# Altium PCB lisa_mx_s.PcbDoc
Units mm, origin at the board's own origin, x right, y up, seen from the top; angles counter-clockwise.
Board outline 19.41 x 21.74 mm, 4 copper layers (Top Layer, Vcc, GND, Bottom Layer); 55 components, 66 nets, 234 pads, 51 vias.
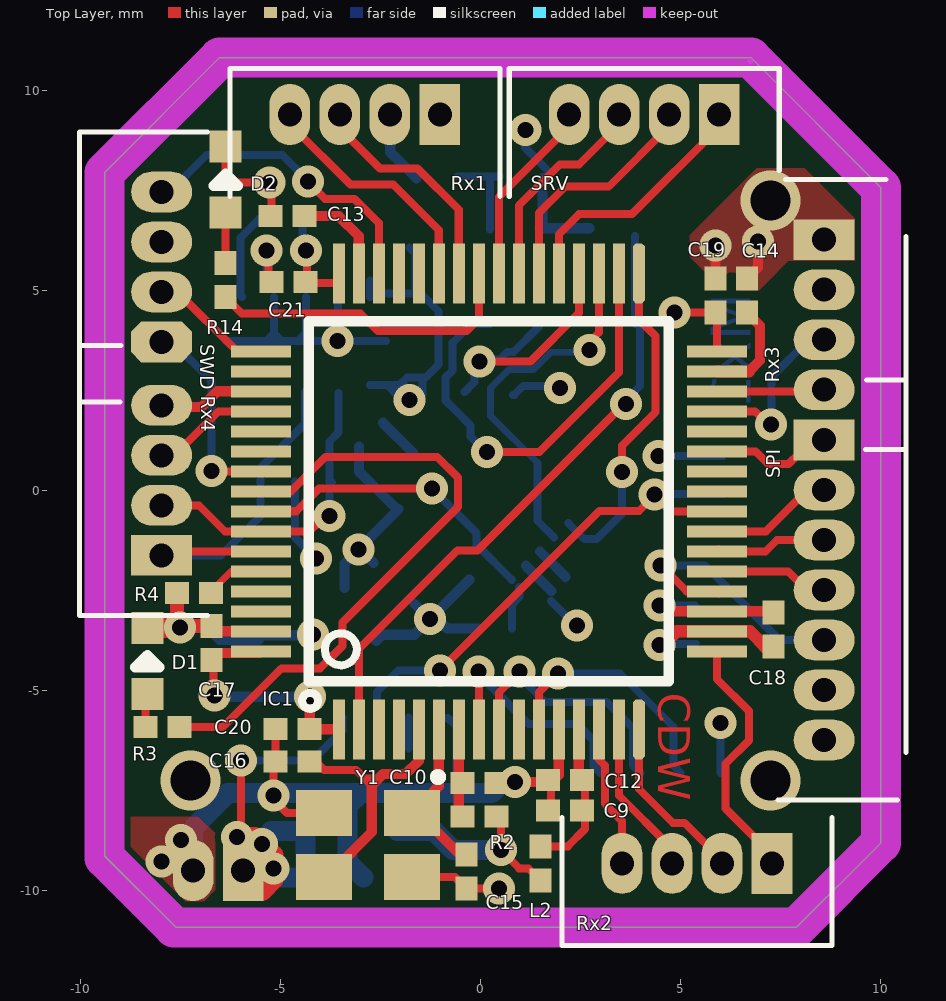
[diagram p0: Top Layer view]
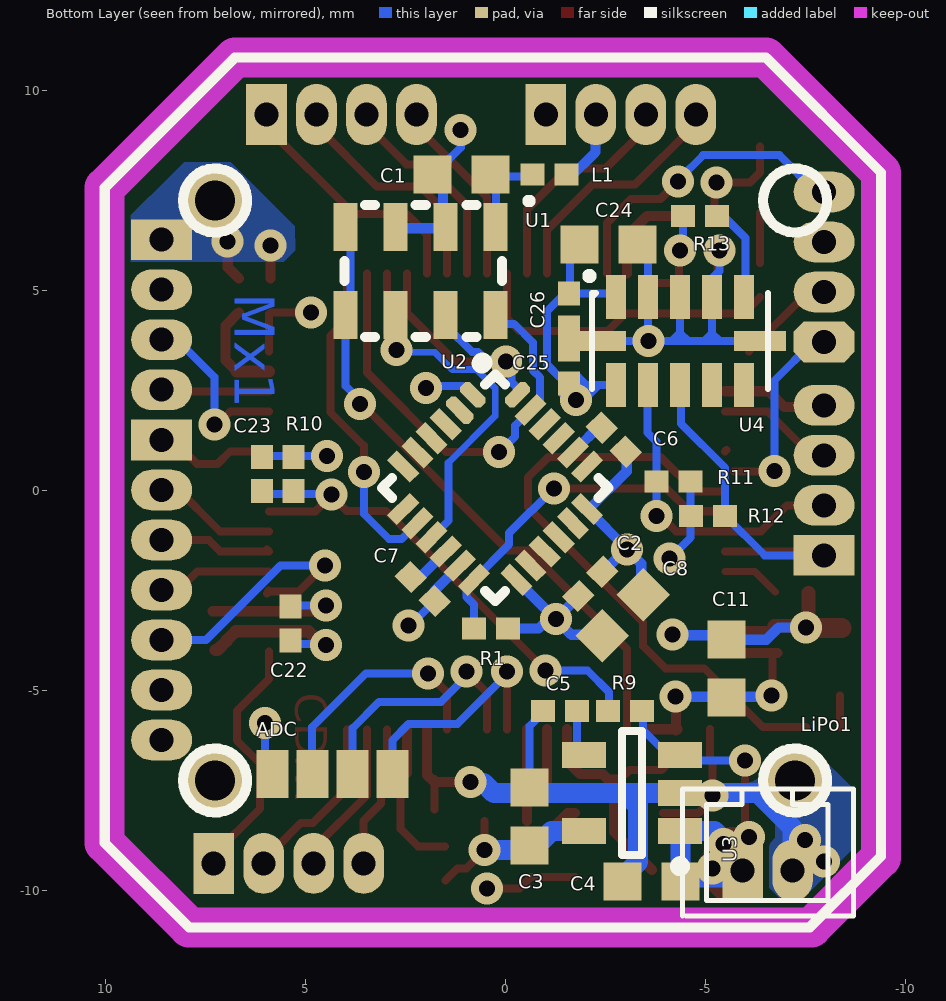
[diagram p1: Bottom Layer view, seen from below]
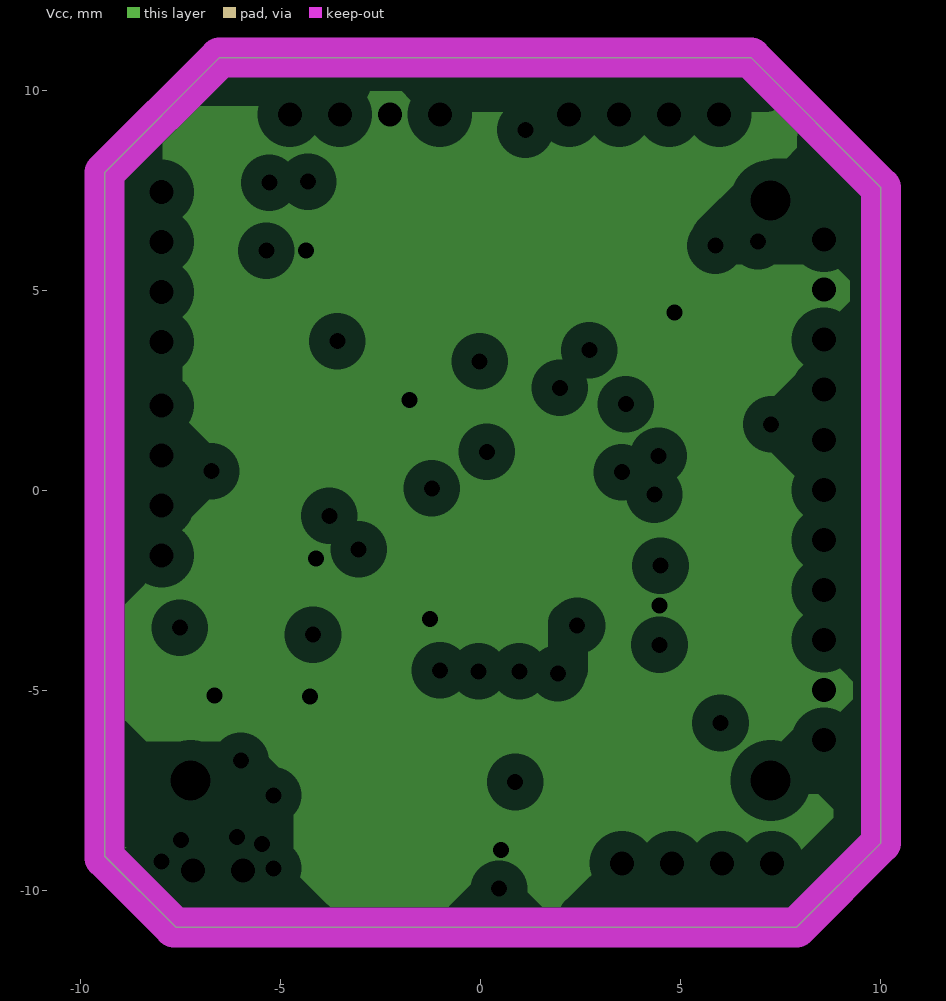
[diagram p2: Vcc, clearances drawn from the general rule]
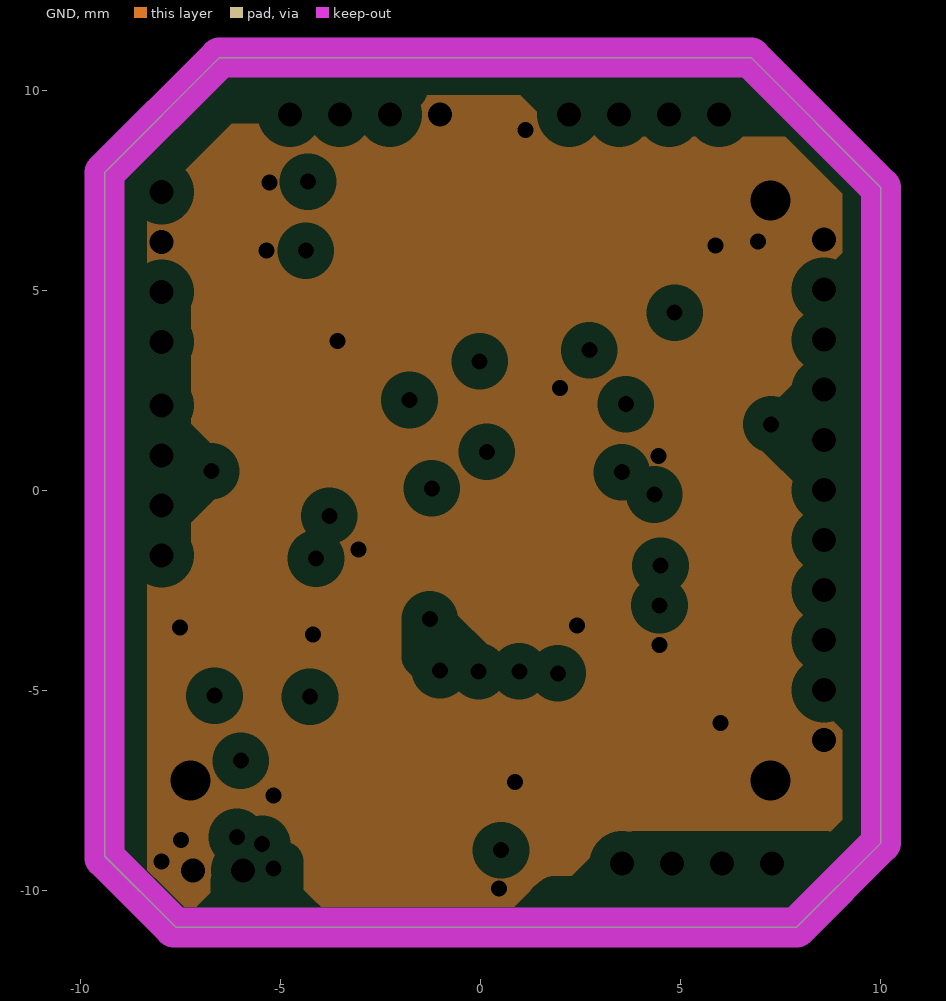
[diagram p3: GND, clearances drawn from the general rule]

## Layer stack, top to bottom
Top Layer: signal copper 0.0356
Dielectric: core 0.32, FR-4, Dk 4.8
Vcc: plane copper 0.0356, net (Multiple Nets)
Dielectric: prepreg 0.32, FR-4, Dk 4.8
GND: plane copper 0.0356, net GND
Dielectric: core 0.32, FR-4, Dk 4.8
Bottom Layer: signal copper 0.0356

## Board outline
-9.397,-9.143 -7.619,-10.921 7.9,-10.921 10.008,-8.813 10.008,7.57 6.757,10.821 -6.527,10.821 -9.397,7.951

## Design rules (kind name [scope] priority, off if disabled: settings)
Clearance [All] p1: gap=0.15
ComponentClearance [All] p1 off: gap=0.254 collisioncheckmode=3 verticalgap=0.254 showdistances=FALSE
MinimumSolderMaskSliver [All] p1 off: minsoldermaskwidth=0.254
NetAntennae [All] p1 off: netantennaetolerance=0
PlaneClearance [All] p1: clearance=0.508
PlaneConnect [All] p1: planeconnectstyle=Direct reliefexpansion=0.508 reliefentries=4 reliefconductorwidth=0.254 reliefairgap=0.254
PolygonConnect [All] p1: connectstyle=Direct reliefconductorwidth=0.254 reliefentries=4 polygonreliefangle="90 Angle"
RoutingVias [All] p1: holewidth=0.711 width=1.27 viastyle="Through Hole" minholewidth=0.4 minwidth=0.8 maxholewidth=2 maxwidth=3
SilkToSilkClearance [All] p1 off: silktosilkclearance=0.254
SilkscreenOverComponentPads [All] p1 off: minsilkscreentomaskgap=0.254
SolderMaskExpansion SolderMaskExpansion_1 [IsVia] p1: expansion=-1
SolderMaskExpansion [All] p2: expansion=0.102
TestPointUsage [All] p1: valid=0 allowmultiple=FALSE
Testpoint [All] p1: side=15 testpointundercomponent=TRUE minsize=1.016 maxsize=2.54 preferedsize=1.524 minholesize=0 maxholesize=1.016 preferedholesize=0.813 testpointgrid=0.025 style=1023 order=0-112345678
Width [All] p1: maxlimit=0.5 minlimit=0.15 preferedwidth=0.254 toplayer_prefwidth=0.2 bottomlayer_prefwidth=0.2 minimp=50.000000 maximp=50.000000 favimp=50.000000
17 further rules are at their usual default settings.

## Classes and differential pairs
component class whoop: LiPo1 P1 P2 P5 P6 Q1 Q2 Q3 Q4 R5 R6 R7 R8

## Components (designator, comment, footprint, x,y, rotation, side; value= is the part's Value field where it differs from the comment)
ADC "Header 4" 4pin1mmpitch 2.819,-7.087 r0 bottom
C1 "0603" V0603 1.093,7.9 r180 bottom
C2 "0402" V0402 -2.133,-2.336 r135 bottom
C3 "0603" V0603 -0.609,-8.153 r270 bottom
C4 "0603" V0603 -3.657,-9.778 r180 bottom
C5 "0402" V0402 -1.371,-5.511 r180 bottom
C6 "0402" V0402 -2.717,1.271 r225 bottom
C7 "0402" V0402 2.058,-2.463 r225 bottom
C8 "0603" V0603 -2.946,-3.124 r315 bottom
C9 "0402" V0402 2.109,-8 r0 top
C10 "0402" V0402 -0.025,-7.315 r180 top
C11 "0603" V0603 -5.537,-4.444 r90 bottom
C12 "0402" V0402 2.109,-7.238 r0 top
C13 "0402" V0402 -4.825,6.859 r0 top
C14 "0402" V0402 6.655,4.877 r270 top
C15 "0402" V0402 -0.355,-9.524 r90 top
C16 "0402" V0402 -4.698,-6.781 r180 top
C17 "0402" V0402 -6.73,-3.809 r270 top
C18 "0402" V0402 7.316,-3.479 r90 top
C19 "0402" V0402 5.868,4.877 r270 top
C20 "0402" V0402 -4.698,-5.968 r0 top
C21 "0402" V0402 -4.8,5.208 r0 top
C22 "0402" V0402 5.36,-3.327 r90 bottom
C23 "0402" V0402 6.071,0.407 r270 bottom
C24 "0603" V0603 -2.59,6.147 r0 bottom
C25 "0402" V0402 -1.6,3.099 r90 bottom
C26 "0402" V0402 -1.6,4.496 r270 bottom
D1 "RED" KP-1608SURC_R -8.331,-4.267 r90 top
D2 "RED" KP-1608SURC_R -6.375,7.772 r90 top
IC1 "STM32F40x-RG_Dirk" LQFP64 0.204,-0.271 r90 top
L1 "0402" V0402RES -1.117,7.9 r0 bottom
L2 "0402" V0402RES 1.499,-9.321 r90 top
LiPo1 "Header 2" PICOBLADE_53047-0210 -5.918,-9.5 r270 bottom
R1 "0402" V0402RES 0.356,-3.454 r180 bottom
R2 "0402" V0402RES -0.025,-8.153 r0 top
R3 "0402" V0402RES -7.95,-5.918 r180 top
R4 "0402" V0402RES -7.162,-2.565 r0 top
R9 "0402" V0402RES -2.997,-5.511 r180 bottom
R10 "0402" V0402RES 5.284,0.407 r270 bottom
R11 "0402" V0402RES -4.216,0.229 r180 bottom
R12 "0402" V0402RES -5.079,-0.634 r0 bottom
R13 "0402" V0402RES -4.877,6.858 r0 bottom
R14 "0402" V0402RES -6.375,5.258 r90 top
Rx1 "Header 4" PICOBLADE_53047-0410#1 -1.117,9.424 r90 top
Rx2 "Header 4" PICOBLADE_53047-0410#1 7.189,-9.296 r90 top
Rx3 "Header 4" PICOBLADE_53047-0410#1 8.56,6.173 r180 top
Rx4 "Header 4" PICOBLADE_53047-0410#1 -7.95,-1.523 r0 top
SPI "Header 7" PICOBLADE_53047-0710 8.586,1.194 r180 top
SRV "Header 4" PICOBLADE_53047-0410#1 5.868,9.424 r90 top
SWD "Header 4" PICOBLADE_53047-0410#2 -7.95,3.811 r0 top
U1 "MS5611-01BA01 or 03" MS5611-01BA 2.109,5.487 r270 bottom
U2 "MPU6000, MPU6050 or MPU9150" MPU60X0 0.247,0.066 r225 bottom
U3 "3.3V LDO" SOT-23-OT5_N -3.174,-7.569 r0 bottom
U4 "VL53L0X" VL53L0XTRA -4.368,3.734 r0 bottom
Y1 "3SMXB" CFPX-5 -2.819,-8.864 r180 top

## Footprints (in the part's own frame and the unit in brackets; to place one, negate y for a bottom-side part, rotate by r counter-clockwise, add the part's x,y. Pads: shape width x height; smd on the part's side, far side on the other; paste and mask are expansions set on the pad)
4pin1mmpitch [mm]
  rect 0.8x1.2 smd: 1(0,0) 2(1,0) 3(2,0) 4(3,0)
CFPX-5 [mm] "Quartz Crystal, SM; Body 3.4 x 2.7 mm (LxW max)"
  rect 1.4x1.15 smd: 1(-1.1,-0.8) 2(1.1,-0.8) 3(1.1,0.8) 4(-1.1,0.8)
  silkscreen extent -1.85,-1.8 -1.65,-1.6, body extent -1.9,-1.48 1.9,1.48, height 1
KP-1608SURC_R [mm]
  rect 0.8x0.8 smd: 1(-0.825,0) 2(0.825,0)
  silkscreen extent -0.15,-0.3 0.15,0.3, body extent -0.81,-0.41 0.79,0.38, height 1
LQFP64 [mm]
  rect 1.5x0.3 smd: 1(-5.7,3.75) 2(-5.7,3.25) 3(-5.7,2.75) 4(-5.7,2.25) 5(-5.7,1.75) 6(-5.7,1.25) 7(-5.7,0.75) 8(-5.7,0.25) 9(-5.7,-0.25) 10(-5.7,-0.75) 11(-5.7,-1.25) 12(-5.7,-1.75) 13(-5.7,-2.25) 14(-5.7,-2.75) 15(-5.7,-3.25) 34(5.7,-3.25) 35(5.7,-2.75) 36(5.7,-2.25) 37(5.7,-1.75) 38(5.7,-1.25) 39(5.7,-0.75) 40(5.7,-0.25) 41(5.7,0.25) 42(5.7,0.75) 43(5.7,1.25) 44(5.7,1.75) 45(5.7,2.25) 46(5.7,2.75) 47(5.7,3.25) 48(5.7,3.75)
  oct 1.5x0.3 smd: 16(-5.7,-3.75) 33(5.7,-3.75)
  rect 0.3x1.5 smd: 17(-3.75,-5.7) 18(-3.25,-5.7) 19(-2.75,-5.7) 20(-2.25,-5.7) 21(-1.75,-5.7) 22(-1.25,-5.7) 23(-0.75,-5.7) 24(-0.25,-5.7) 25(0.25,-5.7) 26(0.75,-5.7) 27(1.25,-5.7) 28(1.75,-5.7) 29(2.25,-5.7) 30(2.75,-5.7) 31(3.25,-5.7) 32(3.75,-5.7) 49(3.75,5.7) 50(3.25,5.7) 51(2.75,5.7) 52(2.25,5.7) 53(1.75,5.7) 54(1.25,5.7) 55(0.75,5.7) 56(0.25,5.7) 57(-0.25,5.7) 58(-0.75,5.7) 59(-1.25,5.7) 60(-1.75,5.7) 61(-2.25,5.7) 62(-2.75,5.7) 63(-3.25,5.7) 64(-3.75,5.7)
  silkscreen extent -5.19,-4.5 4.5,4.67, body extent -4.5,-4.5 4.5,4.5, height 2.54
MPU60X0 [mm] "4X4MM"
  oct 0.724x0.345 smd: 1(-2.038,1.25)
  oct 0.8x0.345 smd: 2(-2,0.75)
  rect 0.8x0.345 smd: 3(-2,0.25) 4(-2,-0.25) 5(-2,-0.75) 6(-2,-1.25) 13(2,-1.25) 14(2,-0.75) 15(2,-0.25) 16(2,0.25) 17(2,0.75) 18(2,1.25)
  rect 0.345x0.8 smd: 7(-1.25,-2) 8(-0.75,-2) 9(-0.25,-2) 10(0.25,-2) 11(0.75,-2) 12(1.25,-2) 19(1.25,2) 20(0.75,2) 21(0.25,2) 22(-0.25,2) 23(-0.75,2)
  oct 0.345x0.724 smd: 24(-1.25,2.038)
  silkscreen extent -2.44,-2 2,2, body extent -2,-2 2,2, height 0.9
MS5611-01BA [mm] "Precision Barometer"
  rect 1.2x0.6 smd: 1(-1.1,1.875) 2(-1.1,0.625) 3(-1.1,-0.625) 4(-1.1,-1.875) 5(1.1,-1.875) 6(1.1,-0.625) 7(1.1,0.625) 8(1.1,1.875)
  silkscreen extent -1.78,-1.91 1.65,2.74, body extent -1.5,-2.5 1.5,2.5, height 1.7
PICOBLADE_53047-0210 [mil]
  rect 60x40 hole 23.62: 1(0,0.79)
  oval 60x40 hole 23.62: 2(0,50)
  silkscreen extent -80,-58 45,110, body extent -80,-60 45,110, height 118
PICOBLADE_53047-0410#1 [mil]
  rect 60x40 hole 23.62: 1(-1,-3.82)
  oval 60x40 hole 23.62: 2(-1,45.39) 3(-1,94.61) 4(-1,143.82)
  silkscreen extent -82,-63 44,203
PICOBLADE_53047-0410#2 [mil]
  oct 60x40 hole 23.62: 1(-1,-3.82)
  oval 60x40 hole 23.62: 2(-1,45.39) 3(-1,94.61) 4(-1,143.82)
  silkscreen extent -82,-63 44,203
PICOBLADE_53047-0710 [mil]
  rect 60x40 hole 23.62: 1(0,-2.64)
  oval 60x40 hole 23.62: 2(0,46.57) 3(0,95.79) 4(0,145) 5(0,194.21) 6(0,243.43) 7(0,292.64)
  silkscreen extent -81,-62 45,352
SOT-23-OT5_N [mm] "SOT23, 5-Leads, Body 2.9x1.6mm, Pitch 0.95mm, Lead Span 2.7mm, IPC Medium Density"
  rect 1.1x0.65 smd: 1(-1.2,0.95) 2(-1.2,0) 3(-1.2,-0.95) 4(1.2,-0.95) 5(1.2,0.95)
  silkscreen extent -1.32,-1.55 0.25,1.95, body extent -0.9,-1.55 0.9,1.55, height 1.45
V0402 [mm] "Chip Capacitor; Body 1.0 x 0.5 mm (LxW typ)"
  rect 0.6x0.55 smd: 1(-0.425,0) 2(0.425,0)
  body extent -0.5,-0.25 0.5,0.25, height 0.5
V0402RES [mm] "Chip Capacitor; Body 1.0 x 0.5 mm (LxW typ)"
  rect 0.6x0.55 smd: 1(-0.425,0) 2(0.425,0)
  body extent -0.5,-0.25 0.5,0.25, height 0.25
V0603 [mm] "Chip Capacitor; Body 1.6 x 0.8 mm (LxW typ)"
  rect 0.95x0.95 smd: 1(-0.725,0) 2(0.725,0)
  body extent -0.8,-0.4 0.8,0.4, height 0.7
VL53L0XTRA [mm]
  rect 0.5x1.1 smd: 1(1.6,-1.1) 2(0.8,-1.1) 3(0,-1.1) 4(-0.8,-1.1) 5(-1.6,-1.1) 7(-1.6,1.1) 8(-0.8,1.1) 9(0,1.1) 10(0.8,1.1) 11(1.6,1.1)
  rect 1.3x0.5 smd: 6(-2,0) 12(2,0)
  silkscreen extent -2.2,-1.68 2.31,1.2, body extent -2.2,-1.2 2.2,1.2, height 1.05

## Part data
ADC Rx1 Rx2 Rx3 Rx4 SRV SWD: "Header, 4-Pin"
C1 C5 C8 C9 C10 C11 C12 C13 C14 C15 C16 C17 C18 C19 C20 C21 C22 C23: library part Cap, "Capacitor"
C2 C6 C7 C25 C26: library part CAP, "Capacitor"
C3 C4 C24: library part K0603_100nF_50V_X7R, "Capacitor"
D1 D2: library part LED2, "Typical RED, GREEN, YELLOW, AMBER GaAs LED"
L1 L2 R1 R2 R3 R4 R9 R10 R11 R12 R13 R14: library part Res3, "Resistor"
LiPo1: "Header, 2-Pin"
SPI: "Header, 7-Pin"
U1: library part MS5611-01BA01, "MS5611-01BA01 High Resolution Barometer Module"
U2: library part MPU6000, "INVENSENSE Integrated Dual Axis Gyroscope"
U3: library part LP2992AIM5-5.0, "Micropower 250 mA Low-Noise Ultra Low-Dropout Regulator in SOT-23 and LLP Packages"
Y1: "Surface Mount Quartz Crystal"

## Via types
v1: diameter 0.8, hole 0.4, Top Layer to Bottom Layer, 48 vias
v2: diameter 1.5, hole 1, Top Layer to Bottom Layer, 3 vias

## Nets (pads, with @x,y where several pads share a name; then routed paths per layer and width w, separated by ;. In a path a pad name is that pad's centre, name@x,y a point inside that pad or via, vN(x,y) a via of type N, cw(c..) or ccw(c..) an arc to the next point about the centre after c; other vN are vias at no path point)
+3.3V: C2.1 C3.2 C8.2 C11.1 C17.2 C18.2 C19.2 C20.2 C21.2 C22.2 C24.2 C25.1 C26.1 IC1.1 IC1.19 IC1.32 IC1.48 IC1.64 L1.1 L2.1 R1.2 R2.2 R11.2 R12.2 R13.2 Rx1.2 Rx3.2 SPI.6 U2.13 U3.5 U4.1 U4.11 | length 36
  Top Layer w0.2: v1@-6.68,-5.105 C17.2@-6.68,-4.235 ; C21.2@-4.417,5.182 IC1.48@-3.606,5.182 ; C21.2@-4.343,5.208 v1@-4.343,6.039 ; v1@-4.273,-5.162 v1(-4.267,-5.156) ; R2.2@0.509,-8.261 v1(0.509,-8.991) 0.964,-9.446 1.192,-9.446 L2.1@1.492,-9.746 ; v1(4.852,4.446) C19.2@5.861,4.446 ; IC1.32 C19.2@5.904,4.416
  Top Layer w0.254: C17.2@-6.811,-4.06 IC1.64@-5.536,-4.06 ; C20.2@-4.305,-5.971 IC1.1 ; C20.2@-4.273,-5.994 v1@-4.273,-5.162 ; v1@4.42,-2.641 4.8,-3.021 IC1.19 C18.2@7.316,-3.021
  Bottom Layer w0.2: R11.2 -4.641,-1.175 v1(-4.114,-1.701) ; v1@-4.452,6.007 R13.2 ; v1@-4.44,5.995 v1(-4.368,5.995) ; U4.11 v1@-1.912,2.634 ; U4.1 U4.1@-2.768,5.244 ; U4.1@-2.681,4.921 C26.1 ; -2.336,2.634 -2.065,2.363 -1.879,2.363 v1(-1.777,2.261) -1.676,2.363 -1.473,2.363 -1.447,2.388 C25.1@-1.447,2.751 ; -2.031,2.634 -1.846,2.82 -1.375,2.82 -1.049,3.146 -1.049,4.479 -1.625,5.055 -1.625,5.919 C24.2@-1.777,6.071 ; v1@4.496,-2.87 C22.2@5.353,-2.87
  Bottom Layer w0.254: v1@-6.73,-5.156 v1(-4.267,-5.156) ; C8.2@-2.611,-3.763 -2.454,-3.606 -1.657,-3.606 v1(-1.269,-3.218) ; Rx1.2@-2.27,8.982 -2.26,8.972 -2.26,8.459 L1.1@-1.6,7.798 ; C2.1@-1.653,-2.834 v1(-1.269,-3.218) ; v1@-1.177,-3.126 -1.165,-3.126 -0.838,-3.454 R1.2 ; U2.13 v1(-1.269,-3.218)
  Bottom Layer w0.5: U3.5@-2.076,-8.519 -1.158,-8.519 -0.685,-8.991 v1(0.509,-8.991)
  other v1: -6.655,-5.131 4.471,-2.87
+3.3V_AP_ANALOG: C9.2 C12.2 IC1.13 L2.2 | length 3.6
  Top Layer w0.2: L2.2 2.178,-8.896 2.61,-8.464 C12.2@2.61,-7.213
  Top Layer w0.254: C12.2@2.454,-7.058 IC1.13
ADC1A: ADC.3 IC1.11 | length 6.3
  Top Layer w0.2: IC1.11 1.454,-5.048 v1(1.931,-4.571)
  Bottom Layer w0.2: v1(1.931,-4.571) 3.479,-4.571 4.826,-5.918 4.826,-6.889 ADC.3@4.998,-7.061
ADC2A: ADC.1 IC1.8 | length 6
  Top Layer w0.2: v1@-0.304,-4.622 -0.046,-4.88 IC1.8
  Bottom Layer w0.2: v1@-0.126,-4.521 1.194,-5.841 2.412,-5.841 2.819,-6.248 2.819,-6.882 ADC.1@2.998,-7.061
  other v1: -0.05,-4.521
ADC3A: ADC.2 IC1.9 | length 6.4
  Top Layer w0.2: IC1.9 0.454,-5.058 0.813,-4.698 v1@0.813,-4.495
  Bottom Layer w0.2: v1@0.813,-4.495 1.601,-5.283 3.149,-5.283 3.81,-5.944 3.81,-6.873 ADC.2@3.998,-7.061
  other v1: 0.966,-4.521
BARO_CS: IC1.2 U1.4 U1.5 | length 15.6
  Top Layer w0.2: IC1.2 -3.046,-3.96 -0.584,-1.498 -0.076,-1.498 v1@3.581,2.159
  Bottom Layer w0.2: v1@3.581,2.21 3.988,2.617 U1.5@3.988,4.293 ; U1.5@3.861,4.166 U1.4@3.861,6.366
  other v1: 3.632,2.159
BOOTA: IC1.60 R4.2 | length 1.5
  Top Layer w0.178: R4.2@-6.756,-2.539 -6.241,-2.025 IC1.60@-5.504,-2.025
BYPCA: C5.2 U3.4 | length 0.8
  Bottom Layer w0.2: U3.4@-1.803,-6.452 C5.2@-1.803,-5.675
CPOUT_A: C6.1 U2.20 | length 1.1
  Bottom Layer w0.254: C6.1@-2.444,1.696 U2.20
DRDY: IC1.27 SPI.1 | length 2.3
  Top Layer w0.2: IC1.27 6.87,0.979 7.189,0.661 7.697,0.661 SPI.1@7.976,0.94
GND: ADC.4 C1.1 C2.2 C3.1 C4.1 C5.1 C6.2 C7.2 C8.1 C9.1 C10.1 C11.2 C12.1 C13.1 C14.1 C15.1 C16.2 C17.1 C18.1 C19.1 C20.1 C21.1 C22.1 C23.1 C24.1 C25.2 C26.2 D1.2 D2.2 IC1.12 IC1.18 IC1.63 LiPo1.2 R4.1 R10.1 Rx1.1 Rx3.1 SPI.7 SWD.3 U1.2 U1.3 U2.1 U2.11 U2.18 U3.2 U4.2 U4.3 U4.4 U4.6 U4.12 Y1.2 Y1.4 | length 63.6
  Top Layer w0.2: D2.2 -6.375,7.95 -6.122,7.697 v1(-5.283,7.697) ; C21.1@-5.308,5.208 v1@-5.308,6.078 ; C13.1@-5.232,6.859 v1@-5.232,7.607 ; v1@-5.182,-7.779 C16.2@-5.182,-6.833 ; v1@-5.123,-7.779 -4.838,-8.064 Y1.2@-3.944,-8.064 ; C16.2 C20.1 ; Y1.4@-1.744,-9.664 -0.64,-9.664 C15.1 v1@0.451,-9.949 ; C9.1@1.76,-7.975 C12.1@1.76,-7.213
  Top Layer w0.254: C17.1@-6.761,-3.521 IC1.63 ; v1(0.864,-7.289) 1.771,-7.289 1.954,-7.107 IC1.12 ; C19.1 v1@5.868,6.381 ; C14.1 6.935,5.582 v1(6.935,6.228) v1@7.011,6.305
  Top Layer w0.305: v1@4.674,-3.759 4.912,-3.521 IC1.18 6.732,-3.521 6.956,-3.745 6.956,-3.755 7.186,-3.985 C18.1@7.235,-3.985
  Top Layer w0.35: v1@-7.587,-3.271 R4.1 ; v1@-7.474,-3.384 C17.1
  Top Layer w0.5: D1.2@-8.407,-3.442 v1@-7.532,-3.442
  Bottom Layer w0.2: U4.6 U4.12 ; -5.359,3.734 -5.168,3.925 ; v1(-5.359,5.995) -5.359,5.487 U4.4@-5.168,5.296 ; U4.4 -5.168,3.925 ; -4.978,3.734 -5.168,3.925 ; -4.571,3.734 -4.368,3.938 ; U4.3 -4.368,3.938 ; -4.165,3.734 -4.368,3.938 ; v1@-3.759,3.734 v1@-3.568,3.925 ; v1@-3.733,3.925 v1@-3.568,4.09 ; C24.1@-3.568,5.823 U4.2 v1@-3.568,3.925 ; v1@-3.378,3.734 v1@-3.568,3.925 ; C5.1@-0.971,-5.689 -0.813,-5.689 -0.609,-5.893 C3.1 ; U2.1 0.842,2.391 1.067,2.617 2.058,2.617 v1@2.109,2.668 ; v1@1.107,8.826 1.107,8.572 C1.1@1.652,8.027 ; C7.2 v1@2.371,-3.378 ; v1(4.446,0.864) C23.1@6.064,0.864 ; v1@4.496,-3.835 C22.1@5.379,-3.835 ; ADC.4@5.998,-7.061 v1(5.998,-5.813)
  Bottom Layer w0.254: v1(-7.518,-3.428) -6.833,-3.428 -6.528,-3.734 C11.2@-5.537,-3.734 ; C11.2@-5.486,-3.618 v1@-4.369,-3.618 ; C8.1@-3.403,-2.438 -3.403,-1.828 v1(-3.047,-1.473) ; C6.2@-3.043,1.097 -3.043,0.479 -2.1,-0.464 U2.18 -3.037,-1.45 -2.679,-1.809 ; U2.11 C7.2@1.766,-2.514 ; U1.2@1.468,6.554 U1.3@2.718,6.554 ; U1.2@1.55,6.605 C1.1@1.55,7.812
  Bottom Layer w0.5: LiPo1.2@-7.188,-9.448 -7.188,-8.432 -6.324,-7.569 0.28,-7.569 v1@0.534,-7.315 ; -3.327,-7.594 -3.327,-8 ; -2.997,-7.569 -3.327,-7.899 -3.327,-8 ; C4.1@-2.932,-9.677 -3.327,-9.282 -3.327,-8
  other v1: 0.458,-9.956 -7.976,-9.271 -7.493,-8.738 -5.181,-7.619 4.471,-3.86 -4.191,-3.607 2.414,-3.378 1.982,2.566 -3.581,3.734 5.868,6.122 1.118,9.018
  other v2: -7.25,-7.25 7.25,-7.25 7.25,7.25
GPIO: U4.7
IMU_CS: IC1.33 U2.8 | length 8.5
  Top Layer w0.2: v1(3.531,0.458) 3.531,1.118 4.369,1.956 4.369,3.862 3.954,4.277 IC1.33
  Bottom Layer w0.2: U2.8 2.592,-1.219 2.896,-1.219 3.531,-0.584 3.531,0.417 v1@3.673,0.559
IMU_MISO: IC1.35 U1.6 U2.9 | length 9.1
  Top Layer w0.2: v1@2.654,3.645 2.954,3.945 IC1.35
  Bottom Layer w0.17: 1.417,0.693 0.247,1.862 0.247,2.558 0.712,3.023 1.321,3.023 1.753,3.455 v1@2.718,3.455
  Bottom Layer w0.2: 1.417,0.693 1.417,-0.755 1.833,-1.171 U2.9
  other v1: 2.718,3.506
IMU_MOSI: IC1.36 U1.7 U2.24 | length 6.9
  Top Layer w0.2: v1@-0.177,3.226 1.245,3.226 2.454,4.435 IC1.36
  Bottom Layer w0.2: U2.24@-0.406,2.464 -0.158,2.712 v1@-0.158,3.22 ; v1@-0.152,3.277 0.483,3.277 0.674,3.468 0.826,3.468 U1.7@1.448,4.09
  other v1: -0.025,3.226
IMU_MPU_INT: IC1.57 R1.1 U2.12 | length 8.7
  Top Layer w0.203: IC1.57 -4.61,-0.521 -4.038,0.051 v1(-1.219,0.051)
  Bottom Layer w0.203: v1(-1.219,0.051) -0.101,-1.066 -0.101,-1.354 U2.12 ; R1.1 0.781,-2.851 0.966,-2.666 U2.12@0.966,-2.421
IMU_SCK: IC1.34 U1.8 U2.23 | length 11
  Top Layer w0.2: v1@0.128,0.966 1.474,0.966 3.455,2.947 IC1.34 IC1.34
  Bottom Layer w0.2: v1@0.166,0.928 -0.253,1.347 -0.253,1.627 U2.23 -0.877,2.251 -0.877,2.823 -0.699,3.001 -0.699,3.695 -0.228,4.166 U1.8@0.229,4.166
  other v1: 0.153,0.966
JTAG_TCK: IC1.49 SWD.2 | length 2.4
  Top Layer w0.2: SWD.2@-7.873,4.964 -7.579,4.964 IC1.49@-6.094,3.479
JTAG_TDI: IC1.50
JTAG_TDO: IC1.55 SWD.1 | length 4.6
  Top Layer w0.2: v1@-6.69,0.479 IC1.55@-5.718,0.479
  Bottom Layer w0.2: SWD.1@-7.873,3.714 -7.7,3.714 -6.73,2.744 -6.73,0.763 v1@-6.654,0.686
  other v1: -6.73,0.483
JTAG_TMS: IC1.46 SWD.4 | length 8
  Top Layer w0.2: v1(-4.317,7.722) -3.886,7.29 -3.15,7.29 -2.546,6.686 IC1.46
  Bottom Layer w0.2: SWD.4 -7.776,7.464 -6.857,8.383 -4.952,8.383 -4.356,7.786 v1@-4.025,7.786
L1: D2.1 R14.2 | length 1.3
  Top Layer w0.2: R14.2 D2.1
L2: D1.1 R3.2 | length 0.8
  Top Layer w0.2: R3.2 D1.1@-8.375,-5.124
LED1: IC1.41 R14.1 | length 7.9
  Top Layer w0.2: R14.1 -5.962,4.42 -2.997,4.42 -2.565,3.988 -0.356,3.988 -0.046,4.297 IC1.41
LED2: IC1.56 R3.1 | length 15.8
  Top Layer w0.2: R3.1 -6.452,-5.918 -4.978,-4.445 -4.013,-4.445 -3.454,-3.886 -3.454,-3.302 -0.569,-0.416 -0.569,0.321 -1.086,0.838 -3.884,0.838 -4.742,-0.021 IC1.56
LED3: IC1.10
LED4: IC1.25
LED5: IC1.4
LIPO: C4.2 LiPo1.1 R9.2 U3.1 U3.3 | length 11.8
  Top Layer w0.2: LiPo1.1@-5.994,-9.469 v1@-5.994,-6.731
  Top Layer w0.5: v1(-6.096,-8.661) -5.638,-8.661 v1(-5.46,-8.839) -5.181,-9.118 -5.181,-9.728 LiPo1.1@-5.461,-10.008
  Bottom Layer w0.2: v1(-5.994,-6.756) U3.3@-4.309,-6.756 ; U3.3@-4.079,-6.619 -3.454,-5.994 -3.454,-5.696 R9.2@-3.447,-5.689
  Bottom Layer w0.5: LiPo1.1@-5.938,-9.214 -5.242,-8.519 U3.1 ; LiPo1.1@-5.588,-9.677 C4.2@-4.47,-9.677 ; C4.2@-4.382,-9.677 U3.1@-4.382,-8.526
  other v1: -5.181,-9.448
M1: 
M2: 
M3: 
M4: 
MISO: IC1.22 SPI.3 | length 2.6
  Top Layer w0.2: IC1.22@5.946,-1.478 IC1.22 7.128,-1.521 7.404,-1.244 SPI.3@8.357,-1.244
MOSI: IC1.23 SPI.2 | length 2.9
  Top Layer w0.2: IC1.23 7.133,-1.021 8.23,0.077 SPI.2@8.306,0.077
NRSTA: C10.2 IC1.7 R2.1 | length 2.3
  Top Layer w0.254: R2.1@-0.546,-8.267 IC1.7
OSC_INA: C16.1 IC1.5 Y1.3 | length 6.7
  Top Layer w0.2: C16.1@-4.089,-6.807 -3.911,-6.984 -3.111,-6.984 -2.889,-7.207 ; -2.721,-7.374 -2.889,-7.207 ; -2.554,-7.207 -2.889,-7.207
  Top Layer w0.254: Y1.3@-3.676,-9.492 -2.721,-8.538 -2.721,-7.374 -2.433,-7.086 -1.87,-7.086 -1.546,-6.762 IC1.5
OSC_OUTA: C15.2 IC1.6 Y1.1 | length 3.3
  Top Layer w0.254: Y1.1@-1.744,-8.064 -1.561,-8.064 C15.2@-0.526,-9.099 ; Y1.1@-1.181,-7.531 -1.046,-7.396 IC1.6
REGOUT_A: C7.1 U2.10 | length 0.9
  Bottom Layer w0.254: U2.10 C7.1@2.124,-2.165
RX1: IC1.43 Rx1.4 | length 5.9
  Top Layer w0.203: Rx1.4@-4.749,9.094 -4.7,9.094 -3.251,7.645 -2.184,7.645 -1.046,6.507 IC1.43
RX2: IC1.17 Rx2.1 | length 6.2
  Top Layer w0.2: IC1.17 5.904,-4.71 6.706,-5.512 6.706,-6.248 6.121,-6.833 6.121,-7.95 Rx2.1@7.286,-9.115
RX3: IC1.30 Rx3.4 | length 2.3
  Top Layer w0.2: IC1.30 Rx3.4@8.164,2.479
RX4: IC1.52 Rx4.3 | length 2.9
  Top Layer w0.2: Rx4.3 -7.655,0.88 -6.555,1.979 IC1.52
RX5: IC1.54 | length 0.1
  Top Layer w0.2: IC1.54@-5.533,1.017 IC1.54
SCK: IC1.21 SPI.4 | length 2.4
  Top Layer w0.2: IC1.21 7.686,-2.021 SPI.4@8.154,-2.489
SCL1/SERVO7: IC1.58 R11.1 Rx4.2 U4.10 | length 7.7
  Top Layer w0.2: Rx4.2 -7.045,-0.37 -6.395,-1.021 IC1.58 -4.272,-1.021 -4.038,-0.787 v1@-3.809,-0.787
  Bottom Layer w0.2: v1(-3.784,-0.634) R11.1@-3.784,0.222 ; R11.1@-3.721,0.204 -3.784,0.267 -3.784,1.22 -3.555,1.448 U4.10@-3.555,2.439
SCL3: U2.7
SDA1/SERVO8: IC1.59 R12.1 Rx4.1 U4.9 | length 8.8
  Top Layer w0.2: Rx4.1@-7.875,-1.521 IC1.59
  Bottom Layer w0.2: Rx4.1 -6.49,-1.62 R12.1 -5.504,0.566 -4.394,1.677 U4.9@-4.394,2.464
SDA3: U2.6
SERVO_1: IC1.37 SRV.1 | length 6.1
  Top Layer w0.2: IC1.37 1.954,6.399 2.464,6.909 3.785,6.909 SRV.1@5.965,9.089
SERVO_2: IC1.38 SRV.2 | length 5.7
  Top Layer w0.2: IC1.38 1.454,6.935 2.114,7.595 3.201,7.595 SRV.2@4.715,9.109 ; SRV.2 SRV.2@4.715,9.475
SERVO_3: IC1.39 SRV.3 | length 5
  Top Layer w0.2: IC1.39 0.954,6.909 0.954,7.126 1.982,8.154 2.464,8.154 SRV.3@3.465,9.155
SERVO_4: IC1.40 SRV.4 | length 4.4
  Top Layer w0.2: IC1.40 0.454,6.931 0.454,7.337 SRV.4@2.215,9.098
SERVO_5: IC1.14 Rx2.4 | length 3.7
  Top Layer w0.2: IC1.14 2.954,-6.724 3.104,-6.874 3.104,-7.828 3.536,-8.26 Rx2.4@3.536,-9.423
SERVO_6: IC1.15 Rx2.3 | length 3.9
  Top Layer w0.2: IC1.15 3.454,-7.62 4.75,-8.916 Rx2.3@4.75,-9.042 ; Rx2.3@4.786,-9.712 Rx2.3@4.786,-9.423
SS: IC1.20 SPI.5 | length 6.7
  Top Layer w0.2: v1@4.433,-1.803 5.15,-2.521 IC1.20 ; IC1.20@5.92,-2.504 IC1.20 ; IC1.20@5.955,-2.572 IC1.20
  Bottom Layer w0.2: v1(4.496,-1.879) 5.614,-1.879 7.474,-3.739 SPI.5
TX1: IC1.42 Rx1.3 | length 5.4
  Top Layer w0.203: Rx1.3@-3.479,9.016 -2.515,8.052 -1.575,8.052 -0.546,7.023 IC1.42
TX2: IC1.16 Rx2.2 | length 4.3
  Top Layer w0.2: IC1.16 3.954,-7.459 4.804,-8.309 5.1,-8.309 5.776,-8.986 5.924,-9.133 Rx2.2@6.036,-9.133
TX3: IC1.29 Rx3.3 | length 4.3
  Top Layer w0.2: IC1.29 6.861,1.979 v1@7.29,1.55
  Bottom Layer w0.2: v1@7.29,1.55 7.269,1.571 7.269,2.834 8.205,3.77 Rx3.3@8.281,3.77
  other v1: 7.265,1.652
TX4: IC1.51 Rx4.4 | length 2.3
  Top Layer w0.254: Rx4.4@-7.594,2.083 -6.984,2.083 -6.588,2.479 IC1.51
TX5: IC1.53
VBAT_MEAS: C23.2 IC1.24 R9.1 R10.2 | length 13.1
  Top Layer w0.2: v1(-1.015,-4.495) 2.972,-0.507 3.963,-0.507 4.319,-0.152 4.369,-0.152 4.738,-0.521 IC1.24
  Bottom Layer w0.2: R9.1@-2.597,-5.689 -2.597,-5.035 -2.057,-4.495 v1@-0.965,-4.495 ; v1@4.351,-0.094 C23.2@6.071,-0.094
  other v1: 4.344,-0.101
VCAP1A: C14.2 IC1.31 | length 2.5
  Top Layer w0.254: C14.2 6.986,4.122 6.986,3.252 6.713,2.979
  Top Layer w0.3: IC1.31 6.713,2.979
VCAP2A: C13.2 IC1.47 | length 2.5
  Top Layer w0.254: C13.2@-4.444,6.859 -3.544,6.859 -3.046,6.36 IC1.47
VCCMS56: C1.2 L1.2 U1.1 | length 2.4
  Bottom Layer w0.2: L1.2@-0.584,7.849 C1.2@0.476,7.849 ; U1.1@0.229,6.528 C1.2@0.229,7.848
XSHUT: R13.1 U4.5 | length 2.4
  Bottom Layer w0.2: U4.5 -6.009,4.875 -6.009,6.31 R13.1@-5.385,6.934
pads on no net: IC1.3 IC1.26 IC1.28 IC1.44 IC1.45 IC1.61 IC1.62 U2.2 U2.3 U2.4 U2.5 U2.14 U2.15 U2.16 U2.17 U2.19 U2.21 U2.22 U4.8
copper on no net: | length 0

## Polygon pours and split planes (outlines as drawn)
GND on Top Layer "NORELIEF" (solid, pour order 1007): -8.559,-10.109 -9.22,-10.109 -9.677,-9.651 -9.677,-8.813 -9.093,-8.229 -9.016,-8.153 -7.061,-8.153 -6.629,-8.585 -6.629,-9.778 -6.629,-9.982 -6.934,-10.286 -7.391,-10.286 -7.823,-9.855 -8.077,-9.855 -8.178,-9.956 -8.178,-10.312 -8.204,-10.337
GND on Top Layer "NORELIEF" (solid, pour order 1008): 9.347,5.74 7.696,5.74 7.188,5.232 6.96,5.004 6.452,5.004 6.452,5.359 6.401,5.41 6.35,5.461 6.198,5.461 6.045,5.309 6.02,5.309 5.766,5.309 5.588,5.486 5.232,5.842 5.232,6.375 6.909,8.052 7.95,8.052 8.103,8.052 9.347,6.807
GND on Bottom Layer "NORELIEF" (solid, pour order 1016): -9.728,-8.788 -9.728,-9.474 -9.143,-10.058 -8.94,-10.261 -7.01,-10.261 -6.934,-10.261 -6.603,-9.931 -6.603,-8.839 -6.756,-8.686 -6.756,-8.153 -6.807,-8.102 -9.067,-8.102 -9.728,-8.762
GND on Bottom Layer "NORELIEF" (solid, pour order 1017): 5.25,6 5.535,5.715 9.449,5.715 9.601,5.867 9.601,6.248 9.601,6.629 8.357,7.874 8.026,8.204 6.934,8.204 6.858,8.204 5.258,6.604
GND on Bottom Layer "NORELIEF" (solid, pour order 1018): -6.045,-7.366 -6.934,-6.477 -7.722,-6.477 -9.144,-7.899 -9.144,-8.357 -8.966,-8.534 -7.163,-8.534 -7.112,-8.484
+3.3V on Vcc (split plane): 227 vertices, not listed, extent -8.887,-10.411 9.302,9.988
+3.3V on Vcc (split plane): -8.864,-8.915 -8.882,-8.937 -8.887,-8.932 -8.887,-8.91 -8.857,-8.91
+3.3V on Vcc (split plane): 8.645,-6.585 8.636,-6.584 8.63,-6.584 8.643,-6.571
GND on GND (split plane): 214 vertices, not listed, extent -8.337,-10.411 9.048,9.886
GND on GND (split plane): 3.861,-9.519 7.753,-9.519 7.513,-9.759 3.575,-9.759 3.759,-9.575 3.809,-9.514

## Keep-outs
Keep-Out Layer:
  lines w1: -9.397,-9.184 -9.397,7.951 -6.527,10.821 6.757,10.821 10.008,7.57 10.008,-8.813 7.9,-10.921 -7.66,-10.921 -9.397,-9.184

## Other copper
Top Layer:
  text "CDW" at 4.445,-5.055 h0.8 r270
Bottom Layer:
  text "Mx1" at 6.756,4.928 h1 r90
Vcc (plane layer: these items are gaps in the copper):
  lines w1: -9.322,-2.565 -8.763,-2.007 ; -9.195,-6.147 -8.56,-6.782 -5.893,-6.782 -5.182,-7.493 -5.182,-9.703 -4.14,-10.744 ; -9.119,-7.391 -6.477,-7.391 -5.918,-7.95 -5.918,-10.363 -5.817,-10.262 -5.156,-10.262 ; -8.508,-9.27 -8.508,-9.728 -8.483,-9.753 -7.289,-9.753 ; -8.458,-1.803 -8.458,8.763 ; -7.95,1.6 -7.95,3.404 ; -7.849,-0.584 -6.807,0.457 ; -7.823,-0.127 -7.823,0.66 ; -7.772,1.549 -7.849,1.549 -6.756,0.457 ; -7.341,-10.389 -7.899,-9.83 -7.899,-9.068 -7.645,-8.814 -7.341,-8.814 -7.747,-8.407 -8.941,-8.407 -8.611,-8.077 -7.137,-8.077 -6.655,-8.56 -6.655,-10.414 ; -7.087,10.109 -3.251,10.109 ; -3.429,10.49 -1.778,10.49 -1.245,9.957 7.137,9.957 ; -0.406,-10.719 0.406,-9.906 ; 0.406,-9.982 1.295,-10.871 1.321,-10.871 ; 2.184,-4.47 2.184,-3.302 ; 2.464,-10.617 3.048,-10.033 7.671,-10.033 9.322,-8.382 9.322,-7.772 8.636,-7.087 8.56,-7.087 7.417,-7.087 8.382,-6.121 ; 5.766,6.375 6.909,7.518 7.417,7.518 8.382,6.553 8.382,6.426 8.103,6.147 6.223,6.147 ; 6.756,6.731 7.671,6.731 ; 7.316,1.575 7.316,1.677 ; 7.316,1.626 8.382,2.692 ; 7.316,1.652 7.316,1.601 8.789,0.128 ; 7.366,7.798 7.849,7.798 8.407,8.357 8.407,8.788 8.56,8.636 8.56,7.315 8.534,7.29 ; 8.814,2.997 8.814,2.337 8.382,1.905 8.382,1.626 8.839,1.168 8.839,0.737 ; 9.195,8.153 9.195,5.994 9.728,5.461 9.728,4.521 9.271,4.064 9.271,-4.039 9.804,-4.572 9.804,-5.436 9.144,-6.096 9.144,-6.553 9.83,-7.239
GND (plane layer: these items are gaps in the copper):
  lines w1: -8.839,-9.474 -8.839,7.264 -5.715,10.389 6.782,10.389 9.55,7.62 9.55,-8.433 7.722,-10.262 1.676,-10.262 1.702,-10.287 ; -8.255,-1.778 -8.255,4.953 ; -7.798,-0.66 -6.68,0.457 ; -7.798,1.524 -6.756,0.483 ; -7.747,-1.727 -7.747,4.801 ; -6.706,-10.719 -6.248,-10.262 ; -6.452,9.677 -5.055,9.677 -4.724,10.008 -1.829,10.008 ; -6.248,-9.779 -6.248,-10.516 -5.969,-10.236 -5.004,-10.236 ; -4.928,-9.271 -4.928,-10.185 -4.394,-10.719 ; -1.473,-3.251 -1.473,-4.166 -1.168,-4.47 ; -1.041,-3.327 -1.041,-3.353 -0.051,-4.343 ; 1.092,-10.871 1.829,-10.135 2.489,-10.135 3.404,-9.22 ; 1.143,10.439 2.108,9.474 ; 3.708,9.347 7.569,9.347 ; 3.861,-9.017 8.636,-9.017 ; 7.341,1.55 7.341,1.398 8.433,0.305 ; 7.367,1.677 7.519,1.677 8.179,2.337 ; 8.763,-5.004 9.601,-5.842 ; 8.839,5.207 9.017,5.207 9.5,5.69

## Silkscreen, mask and mechanical layers (free items; w line width, h text height)
Bottom Overlay:
  circle w0.254: c-7.25,7.25 r0.8
  circle w0.254: c-7.25,-7.25 r0.8
  circle w0.254: c7.25,-7.25 r0.8
  circle w0.254: c7.25,7.25 r0.8
  lines w0.254: -9.397,-9.143 -7.619,-10.921 7.9,-10.921 10.008,-8.813 10.008,7.57 6.757,10.821 -6.527,10.821 -9.397,7.951 -9.397,-9.143
Mechanical 13:
  circle w0.254: c10.25,0 r0.8
  circle w0.254: c-10.25,0 r0.8
  circle w0.254: c0,-10.25 r0.8
  circle w0.254: c0,10.25 r0.8
  circle w0.254: c-7.25,7.25 r0.8
  circle w0.254: c-7.25,-7.25 r0.8
  circle w0.254: c7.25,-7.25 r0.8
  circle w0.254: c7.25,7.25 r0.8
  lines w0.2: -12.75,0 12.75,0 ; 0,-12.75 0,12.75

## Dimensions
-6.527,10.821 to 7.9,-10.921 on Top Overlay
10.008,7.57 to -9.397,7.951 on Top Overlay